# Altium PCB project.PcbDoc
Units mm, origin at the board's own origin, x right, y up, seen from the top; angles counter-clockwise.
Board outline 72.52 x 86.49 mm, 2 copper layers (Top Layer, Bottom Layer); 18 components, 19 nets, 77 pads, 0 vias.
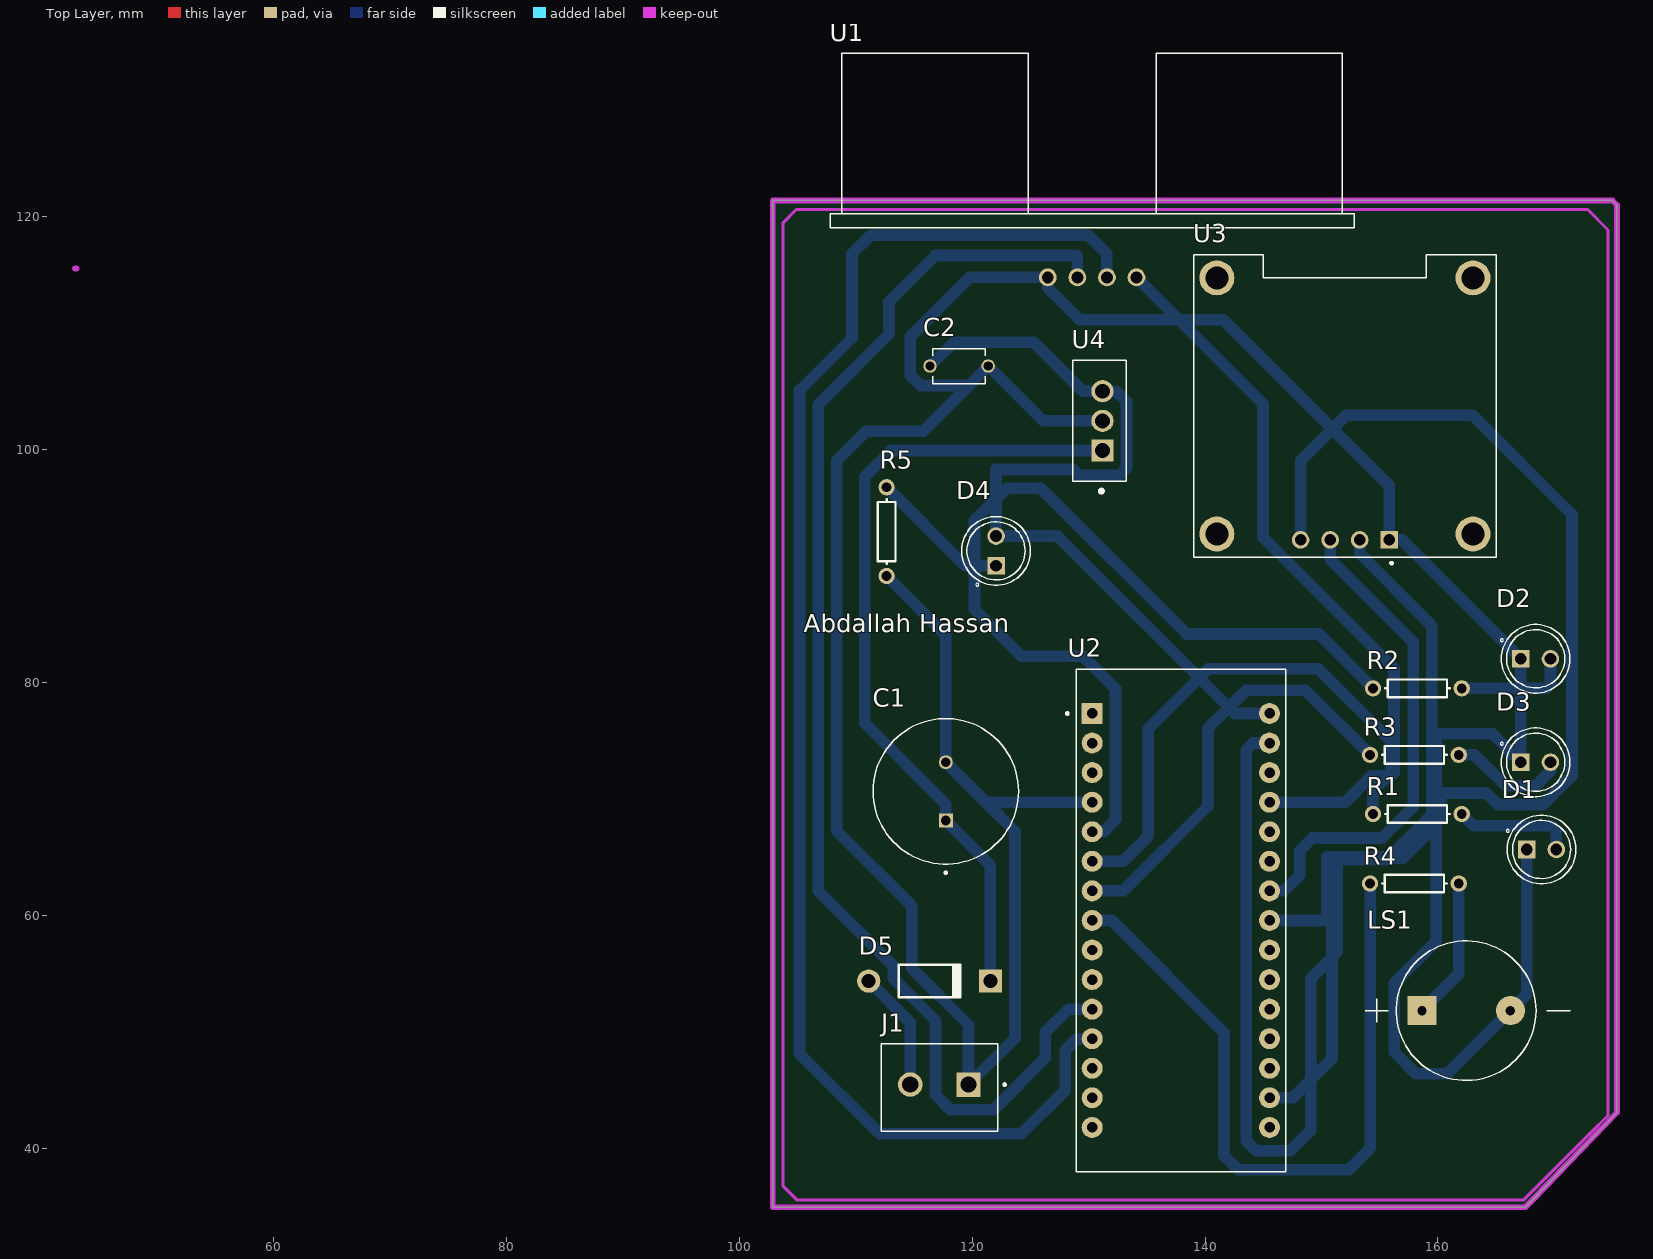
[diagram p0: Top Layer view]
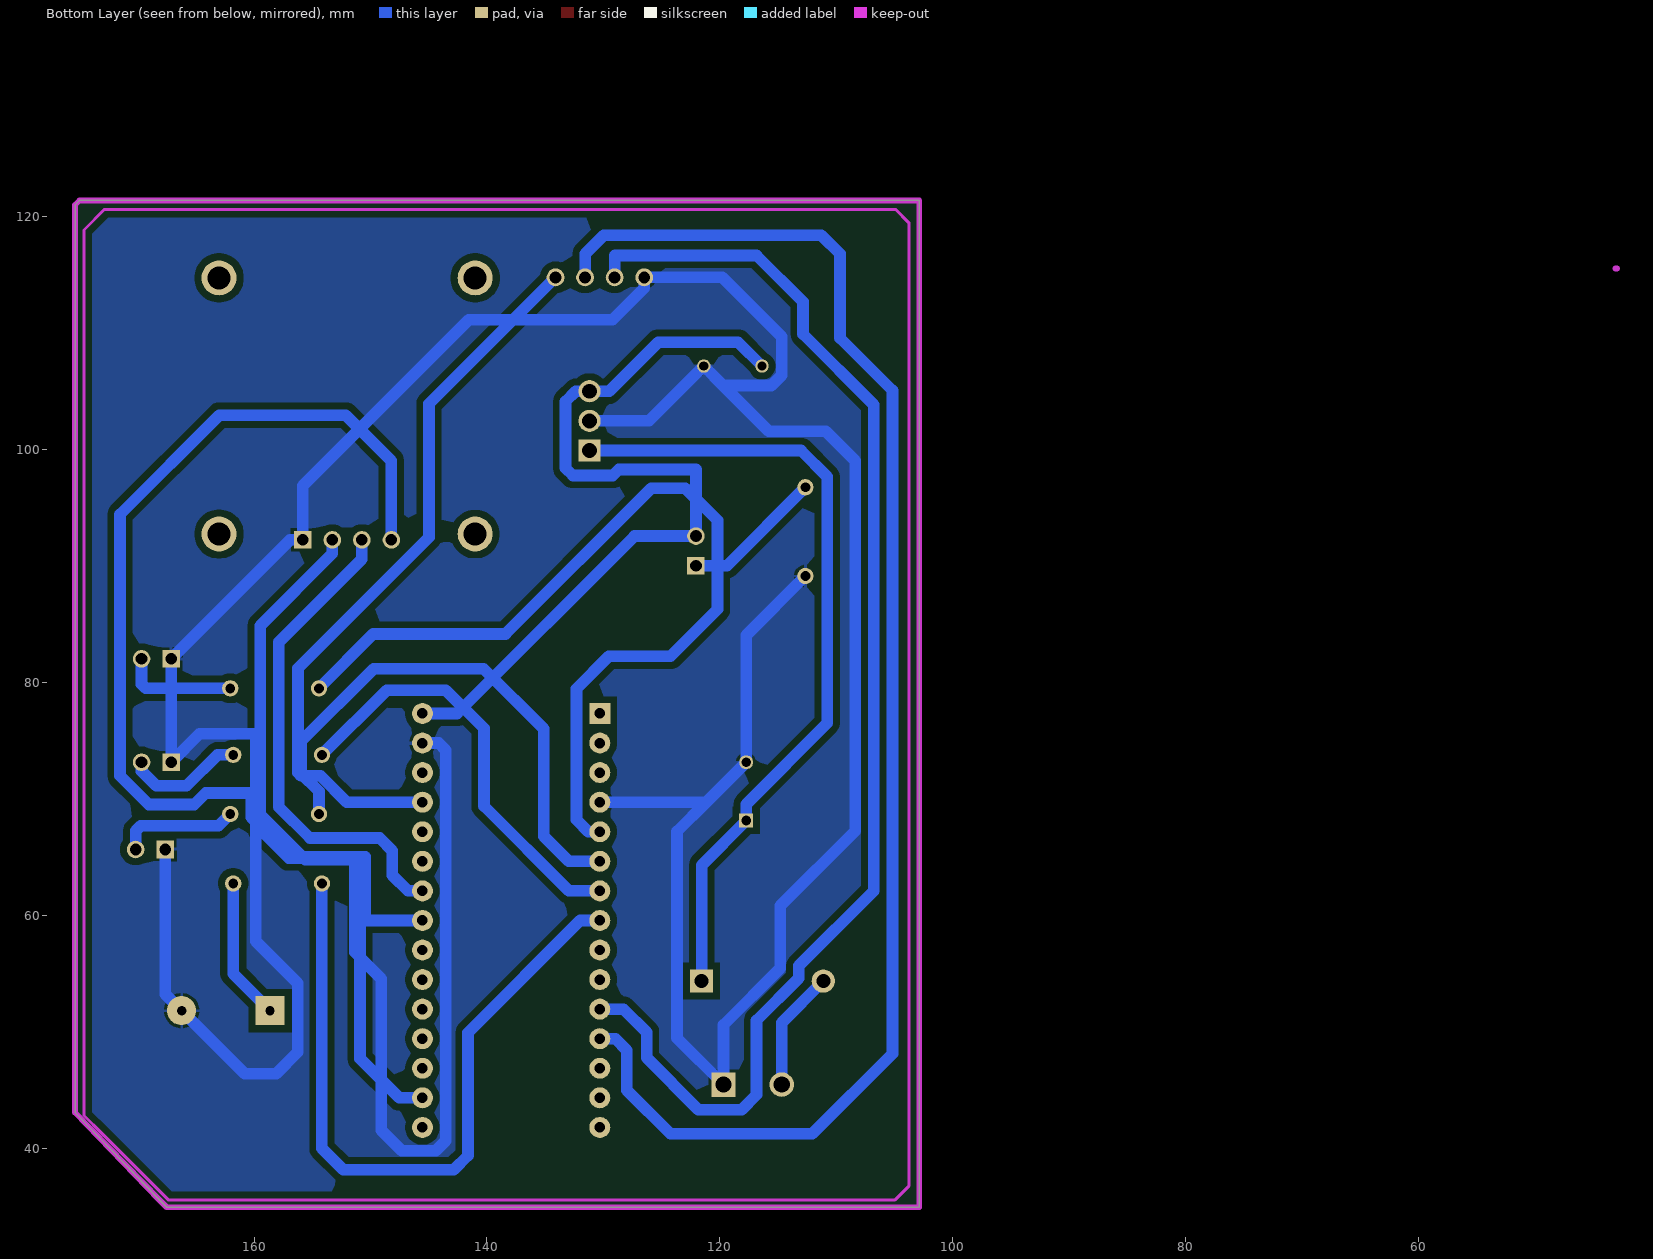
[diagram p1: Bottom Layer view, seen from below]
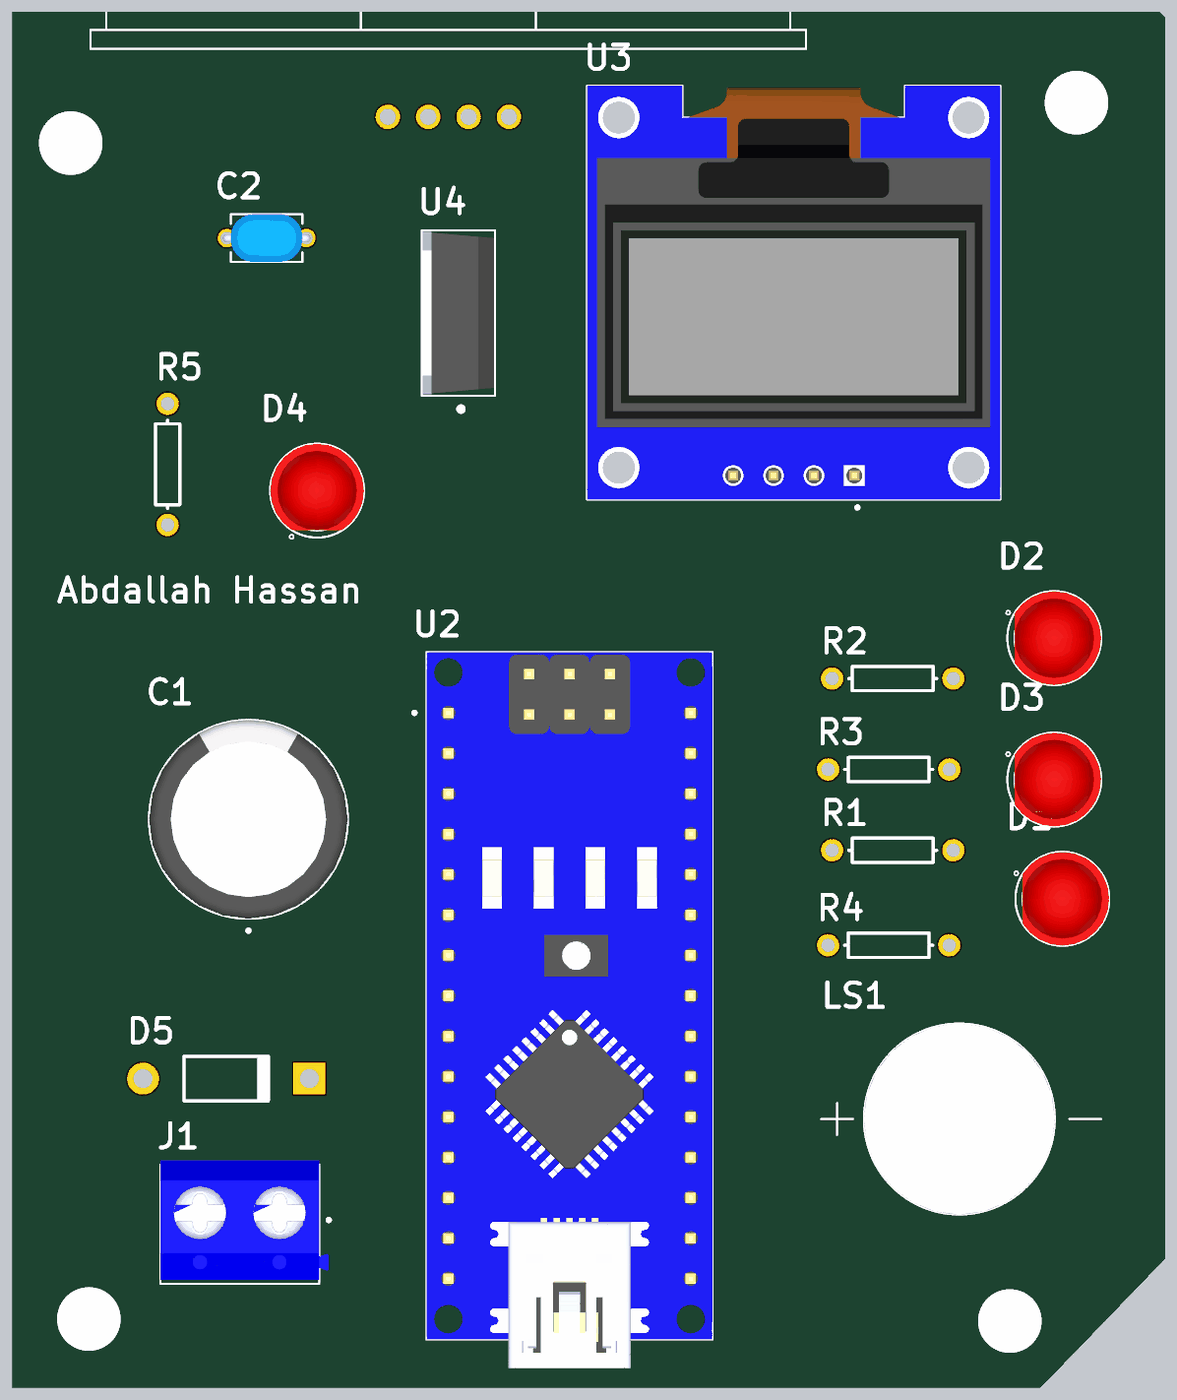
[diagram p2: 3D render of the assembled board from above, using the file's embedded part models]

## Layer stack, top to bottom
Top Solder: solder mask 0.0102, Solder Resist, Dk 3.5
Top Layer: signal copper 0.0356
Dielectric 1: dielectric 0.32, FR-4, Dk 4.8
Bottom Layer: signal copper 0.0356
Bottom Solder: solder mask 0.0102, Solder Resist, Dk 3.5

## Board outline
168.148,35.56 167.513,34.925 102.87,34.925 102.87,121.412 175.006,121.412 175.387,121.031 175.387,43.053

## Design rules (kind name [scope] priority, off if disabled: settings)
Clearance [All] p1: gap=0.6 ignorepadtopadclearanceinfootprint=FALSE
PolygonConnect [All] p1: connectstyle=Relief reliefconductorwidth=0.254 reliefentries=4 polygonreliefangle="90 Angle" airgapwidth=0.254
RoutingVias [All] p1: holewidth=0.711 width=1.27 viastyle="Through Hole" minholewidth=0.711 minwidth=1.27 maxholewidth=0.711 maxwidth=1.27
SolderMaskExpansion [All] p1: expansion=0.102 istentingtop=FALSE
SupplyNets "Schematic Supply Nets_11" [InNet('GND')] p1: voltage=0.000
SupplyNets "Schematic Supply Nets_10" [InNet('VIN')] p2: voltage=0.000
SupplyNets "Schematic Supply Nets_9" [InNet('SDA')] p3: voltage=0.000
SupplyNets "Schematic Supply Nets_8" [InNet('ECHO')] p4: voltage=0.000
SupplyNets "Schematic Supply Nets_7" [InNet('TRIG')] p5: voltage=0.000
SupplyNets "Schematic Supply Nets_6" [InNet('VCC')] p6: voltage=0.000
SupplyNets "Schematic Supply Nets_5" [InNet('LED_Y')] p7: voltage=0.000
SupplyNets "Schematic Supply Nets_4" [InNet('B')] p8: voltage=0.000
SupplyNets "Schematic Supply Nets_3" [InNet('LED_R')] p9: voltage=0.000
SupplyNets "Schematic Supply Nets_2" [InNet('LED_G')] p10: voltage=0.000
SupplyNets "Schematic Supply Nets_1" [InNet('VCC_IN')] p11: voltage=0.000
SupplyNets "Schematic Supply Nets" [InNet('SCL')] p12: voltage=0.000
Width [All] p1: maxlimit=1 minlimit=1 preferedwidth=1 minimp=50.000000 maximp=50.000000 favimp=50.000000
30 further rules are at their usual default settings.

## Components (designator, comment, footprint, x,y, rotation, side; value= is the part's Value field where it differs from the comment)
C1 "ECA2AHG221B" CAPPRD500W60D1250H2500 117.729,70.652 r90 top
C2 "FA24NP02E103JNU06" CAPRB500W50L450T300H550 118.872,107.188 r180 top
D1 "WP7113ID" LED_WP7113ID 168.91,65.659 r0 top
D2 "WP7113ID" LED_WP7113ID 168.402,82.042 r0 top
D3 "WP7113ID" LED_WP7113ID 168.402,73.152 r0 top
D4 "WP7113ID" LED_WP7113ID 122.047,91.313 r90 top
D5 "Diode 1N4001" DO-41 116.332,54.356 r0 top
J1 "KF301-2P" HANDSON_KF301-2P 117.181,45.466 r180 top
LS1 "CMI-1210-5-95T" XDCR_CMI-1210-5-95T 162.433,51.816 r0 top
R1 "Res1" AXIAL-0.3 158.242,68.707 r0 top value=220
R2 "Res1" AXIAL-0.3 158.242,79.502 r0 top value=220
R3 "Res1" AXIAL-0.3 157.988,73.787 r0 top value=220
R4 "Res1" AXIAL-0.3 157.988,62.738 r0 top value=220
R5 "Res1" AXIAL-0.3 112.649,92.964 r90 top value=220
U1 "HC-SR04" XCVR_HC-SR04 130.302,114.808 r180 top
U2 "ARDUINO_NANO" MODULE_ARDUINO_NANO 137.922,59.563 r0 top
U3 "DM-OLED096-636" MODULE_DM-OLED096-636 152.019,103.759 r180 top
U4 "L7812CV" TO-220-3 130.931,102.479 r90 top

## Footprints (in the part's own frame and the unit in brackets; to place one, negate y for a bottom-side part, rotate by r counter-clockwise, add the part's x,y. Pads: shape width x height; smd on the part's side, far side on the other; paste and mask are expansions set on the pad)
AXIAL-0.3 [mm] "Axial Device, Thru-Hole; 2 Leads; 0.3 in Pin Spacing"
  round 1.4 hole 0.85: 1(-3.81,0) 2(3.81,0)
  silkscreen extent -2.77,-0.76 2.77,0.76
CAPPRD500W60D1250H2500 [mm]
  round 1.2 hole 0.85: N(2.5,0)
  rect 1.2x1.2 hole 0.85: P(-2.5,0)
  silkscreen extent -7.1,-6.25 6.25,6.25, body extent -6.25,-6.25 6.25,6.25, height 25
CAPRB500W50L450T300H550 [mm]
  round 1.15 hole 0.8: 1(-2.5,0) 2(2.5,0)
  silkscreen extent -2.25,-1.5 2.25,1.5, body extent -2.75,-1.5 2.75,1.5, height 5.5
DO-41 [mm] "Diode, Axial; Body 5.2 x 2.7 mm (LxDia. max), Lead Dia. 0.86 mm (max)"
  round 2 hole 1.2: 1(-5.23,0)
  rect 2x2 hole 1.2: 2(5.23,0)
  silkscreen extent -2.65,-1.4 2.75,1.4
HANDSON_KF301-2P [mm]
  rect 2.1x2.1 / inner round 2.1 / far side rect 2.1x2.1 hole 1.4: 1(-2.5,0)
  round 2.1 hole 1.4: 2(2.5,0)
  silkscreen extent -5.7,-3.5 5,4, body extent -5.6,-3.75 5,3.75, height 10
LED_WP7113ID [mm]
  round 1.508 hole 1: A(1.27,0)
  rect 1.508x1.508 / inner round 1.508 / far side rect 1.508x1.508 hole 1: C(-1.27,0)
  silkscreen extent -3.03,-2.95 2.95,2.95, body extent -2.5,-2.95 2.95,2.95, height 9.6
MODULE_ARDUINO_NANO [mm]
  rect 1.8x1.8 / inner round 1.8 / far side rect 1.8x1.8 hole 0.9: 1(-7.62,17.78)
  round 1.8 hole 0.9: 2(-7.62,15.24) 3(-7.62,12.7) 4(-7.62,10.16) 5(-7.62,7.62) 6(-7.62,5.08) 7(-7.62,2.54) 8(-7.62,0) 9(-7.62,-2.54) 10(-7.62,-5.08) 11(-7.62,-7.62) 12(-7.62,-10.16) 13(-7.62,-12.7) 14(-7.62,-15.24) 15(-7.62,-17.78) 16(7.62,-17.78) 17(7.62,-15.24) 18(7.62,-12.7) 19(7.62,-10.16) 20(7.62,-7.62) 21(7.62,-5.08) 22(7.62,-2.54) 23(7.62,0) 24(7.62,2.54) 25(7.62,5.08) 26(7.62,7.62) 27(7.62,10.16) 28(7.62,12.7) 29(7.62,15.24) 30(7.62,17.78)
  silkscreen extent -9.85,-21.6 9,21.6, body extent -9,-23.4 9,21.6, height 12.6
MODULE_DM-OLED096-636 [mm]
  rect 1.508x1.508 hole 1: 1(-3.81,11.5)
  round 1.508 hole 1: 2(-1.27,11.5) 3(1.27,11.5) 4(3.81,11.5)
  round 3 hole 2: S1(-11,11) S2(11,11) S3(11,-11) S4(-11,-11)
  silkscreen extent -13,-13 13,13.6, body extent -13,-13 13,13, height 5.66
TO-220-3 [mm]
  rect 1.91x1.91 / inner round 1.91 / far side rect 1.91x1.91 hole 1.27: 1(-2.55,-0.26)
  round 1.91 hole 1.27: 2(0,-0.26) 3(2.55,-0.26)
  silkscreen extent -6.19,-2.3 5.2,2.3, body extent -5.1,-2.25 5.1,2.25, height 19.68
XCVR_HC-SR04 [mm]
  round 1.53 hole 1.02: 1(-3.81,0) 2(-1.27,0) 3(1.27,0) 4(3.81,0)
  silkscreen extent -22.5,-19.27 22.5,-4.27
XDCR_CMI-1210-5-95T [mm]
  round 2.5 hole 0.8: N(3.8,0)
  rect 2.5x2.5 / inner round 2.5 / far side rect 2.5x2.5 hole 0.8: P(-3.8,0)
  silkscreen extent -8.69,-6 8.92,6, body extent -6,-6 6,6, height 7

## Part data
C1: "CAP ALUM 220UF 20% 100V RADIAL", Package="RADIAL-2 Panasonic", Availability="In Stock", Check_prices=https://www.snapeda.com/parts/ECA2AHG221B/Panasonic/view-part/?ref=eda, MF=Panasonic, MP=ECA2AHG221B, Price=None, Purchase-URL=https://pricing.snapeda.com/search/part/ECA2AHG221B/?ref=eda, SnapEDA_Link=https://www.snapeda.com/parts/ECA2AHG221B/Panasonic/view-part/?ref=snap
C2: "Cap Ceramic 0.01uF 250V C0G 5% Radial 5mm 150C Automotive Ammo", Package="Radial TDK", Check_prices=https://www.snapeda.com/parts/FA24NP02E103JNU06/TDK/view-part/?ref=eda, MF=TDK, MP=FA24NP02E103JNU06, SnapEDA_Link=https://www.snapeda.com/parts/FA24NP02E103JNU06/TDK/view-part/?ref=snap
D1 D2 D3 D4: "Red 617nm LED Indication - Discrete 2V Radial", Package="Radial Kingbright", Availability="In Stock", Check_prices=https://www.snapeda.com/parts/WP7113ID/Kingbright/view-part/?ref=eda, MF=Kingbright, MP=WP7113ID, Price=None, Purchase-URL=https://pricing.snapeda.com/search/part/WP7113ID/?ref=eda, SnapEDA_Link=https://www.snapeda.com/parts/WP7113ID/Kingbright/view-part/?ref=snap
D5: "1 Amp General Purpose Rectifier", Code_JEDEC=DO-204-AL, ComponentLink1Description="Manufacturer Link", ComponentLink1URL=http://www.fairchildsemi.com/, ComponentLink2Description=Datasheet, ComponentLink2URL=http://www.fairchildsemi.com/ds/1N%2F1N4001.pdf, DatasheetVersion=1998, LatestRevisionDate=17-Jul-2002, LatestRevisionNote="Re-released for DXP Platform.", PackageDescription="Diode, Axial; Body 5.2 x 2.7 mm (LxDia. max), Lead Dia. 0.86 mm (max)", PackageReference=DO-41, PackageVersion=Aug-1999, Published=8-Jun-2000, Publisher="Altium Limited"
J1: "2 Pin Terminal Block 5mm Pitch", Package=None, Check_prices=https://www.snapeda.com/parts/KF301-2P/Handson+Technology/view-part/?ref=eda, MF="Handson Technology", MP=KF301-2P, SnapEDA_Link=https://www.snapeda.com/parts/KF301-2P/Handson+Technology/view-part/?ref=snap
LS1: "12 mm, 5 Vdc, 98 dB, Through Hole, Magnetic Audio Indicator Buzzer", Package=None, Check_prices=https://www.snapeda.com/parts/CMI-1210-5-95T/Same+Sky/view-part/?ref=eda, MF="Same Sky", MP=CMI-1210-5-95T, SnapEDA_Link=https://www.snapeda.com/parts/CMI-1210-5-95T/Same+Sky/view-part/?ref=snap
R1 R2 R3 R4 R5: "Resistor", LatestRevisionDate=17-Jul-2002, LatestRevisionNote="Re-released for DXP Platform.", PackageDescription="Axial Device, Thru-Hole; 2 Leads; 0.3 in Pin Spacing", PackageReference=AXIAL-0.3, Published=8-Jun-2000, Publisher="Altium Limited"
U1: "Ultrasonic Sensor Module", Package=None, Availability=Unavailable, MP=HC-SR04, Price=None
U2: "Small, complete, and breadboard-friendly board based on the ATmega328 (Arduino Nano 3.x)", Package="Non-Standard Arduino", Check_prices=https://www.snapeda.com/parts/Arduino%20Nano/Arduino/view-part/?ref=eda, MF=Arduino, MP="Arduino Nano", SnapEDA_Link=https://www.snapeda.com/parts/Arduino%20Nano/Arduino/view-part/?ref=snap
U3: "0.96â€ 128 X 64 MONOCHROME GRAPHIC OLED DISPLAY MODULE - I2C", Package=Package, Check_prices=https://www.snapeda.com/parts/DM-OLED096-636/Display+Module/view-part/?ref=eda, MF="Display Module", MP=DM-OLED096-636, SnapEDA_Link=https://www.snapeda.com/parts/DM-OLED096-636/Display+Module/view-part/?ref=snap
U4: "Linear Voltage Regulator IC Positive Fixed 1 Output 1.5A TO-220", Package="TO-220-3 STMicroelectronics", Check_prices=https://www.snapeda.com/parts/L7812CV/STMicroelectronics/view-part/?ref=eda, MF=STMicroelectronics, MP=L7812CV, SnapEDA_Link=https://www.snapeda.com/parts/L7812CV/STMicroelectronics/view-part/?ref=snap

## Free pads (board coordinates)
  round 4 on Top Overlay: 20(165.608,39.116) 21(107.696,39.243) 22(106.553,113.157) 23(169.799,115.697)

## Nets (pads, with @x,y where several pads share a name; then routed paths per layer and width w, separated by ;. In a path a pad name is that pad's centre, name@x,y a point inside that pad or via, vN(x,y) a via of type N, cw(c..) or ccw(c..) an arc to the next point about the centre after c; other vN are vias at no path point)
B: R4.1 U2.8 | length 62.4
  Bottom Layer w1: U2.8 131.978,59.563 141.626,49.916 141.626,39.37 142.845,38.151 152.349,38.151 154.178,39.98 R4.1
ECHO: U1.3 U2.11 | length 113.4
  Bottom Layer w1: U1.3 129.032,116.662 129.007,116.688 116.84,116.688 112.852,112.7 112.852,109.946 106.767,103.861 106.767,62.093 113.202,55.657 113.202,54.61 116.84,50.972 116.84,44.577 118.11,43.307 121.844,43.307 126.289,47.752 126.289,49.962 128.27,51.943 U2.11
GND: C1.N C2.1 D1.C D2.C D3.C J1.1 LS1.N R5.1 U1.4 U2.4 U2.29 U3.1 U4.2 | length 375.9
  Bottom Layer w1: R5.1 117.729,84.074 C1.N 121.158,69.723 ; U2.4 121.158,69.723 ; U4.2 126.081,102.479 C2.1 119.696,105.512 ; U2.29 144.145,74.803 143.535,74.193 143.535,40.64 144.399,39.776 147.32,39.776 149.073,41.529 149.073,54.559 151.333,56.82 151.333,64.795 155.62,64.795 159.868,69.043 ; D1.C 167.64,53.223 LS1.N 160.823,46.406 158.115,46.406 156.261,48.26 156.261,54.178 159.868,57.785 159.868,69.043 ; 119.696,105.512 115.784,101.6 110.907,101.6 108.367,99.06 108.367,67.25 114.802,60.815 114.802,55.454 119.681,50.575 J1.1 123.673,49.458 123.673,67.208 121.158,69.723 ; 119.696,105.512 115.57,105.512 114.681,106.401 114.681,109.703 119.786,114.808 U1.4 126.492,113.894 129.212,111.174 141.556,111.174 155.829,96.901 U3.1 156.915,92.259 D2.C D3.C 164.694,75.59 159.868,75.59 159.868,69.043
LED_G: R2.1 U2.5 | length 78.8
  Bottom Layer w1: U2.5 131.293,67.183 132.309,68.199 132.309,79.477 129.54,82.245 124.231,82.245 120.193,86.284 120.193,93.929 122.961,96.698 125.882,96.698 138.405,84.176 149.758,84.176 R2.1
LED_R: R3.1 U2.7 | length 37.2
  Bottom Layer w1: U2.7 132.969,62.103 140.259,69.393 140.259,76.073 143.535,79.35 148.615,79.35 R3.1
LED_Y: R1.1 U2.6 | length 47.4
  Bottom Layer w1: U2.6 132.969,64.643 135.128,66.802 135.128,76.022 140.297,81.191 149.72,81.191 155.981,74.93 155.981,72.219 154.432,70.67 R1.1
NetC1_P: C1.P D5.2 U4.1 | length 69.1
  Bottom Layer w1: D5.2 121.562,64.319 C1.P 117.729,69.558 110.767,76.521 110.767,97.669 113.027,99.929 U4.1
NetD1_A: D1.A R1.2 | length 10.3
  Bottom Layer w1: R1.2 163.068,67.691 169.748,67.691 170.18,67.259 D1.A
NetD2_A: D2.A R2.2 | length 10
  Bottom Layer w1: R2.2 169.316,79.502 169.672,79.858 D2.A
NetD3_A: D3.A R3.2 | length 10.3
  Bottom Layer w1: R3.2 163.143,73.787 165.81,71.12 168.402,71.12 169.672,72.39 D3.A
NetD4_C: D4.C R5.2 | length 12.2
  Bottom Layer w1: R5.2 119.38,90.043 D4.C
NetD5_1: D5.1 J1.2 | length 10.4
  Bottom Layer w1: D5.1 114.681,50.777 J1.2
NetLS1_P: LS1.P R4.2 | length 12.2
  Bottom Layer w1: LS1.P 161.798,54.981 R4.2
SCL: U2.24 U3.3 | length 42.4
  Bottom Layer w1: U2.24 146.787,62.103 148.128,63.445 148.128,65.548 149.225,66.645 155.207,66.645 157.872,69.31 157.872,83.477 150.749,90.601 U3.3
SDA: U2.23 U3.4 | length 94.1
  Bottom Layer w1: U2.23 150.444,59.563 150.444,65.024 156.846,65.024 160.249,68.426 160.249,70.51 164.157,70.51 165.147,69.52 169.065,69.52 171.526,71.981 171.526,94.437 162.992,102.972 152.121,102.972 148.209,99.06 U3.4
TRIG: U1.2 U2.12 | length 129.2
  Bottom Layer w1: U2.12 128.956,49.403 127.978,48.426 127.978,44.976 124.231,41.229 112.044,41.229 105.167,48.106 105.167,105.087 109.677,109.597 109.677,116.84 111.277,118.44 129.972,118.44 131.572,116.84 U1.2
VCC: U1.1 U2.27 | length 63.5
  Bottom Layer w1: U1.1 144.983,103.937 144.983,92.481 156.235,81.229 156.235,72.238 155.981,71.984 154.305,71.984 152.044,69.723 U2.27
VCC_IN: U2.17 U3.2 | length 61
  Bottom Layer w1: U2.17 147.542,44.323 150.901,47.682 150.901,64.922 157.023,64.922 159.487,67.386 159.487,84.887 153.289,91.084 U3.2
VIN: C2.2 D4.A U2.30 U4.3 | length 72.8
  Bottom Layer w1: C2.2 118.429,109.245 125.273,109.245 129.489,105.029 U4.3 132.359,105.029 133.248,104.14 133.248,98.425 132.613,97.79 129.184,97.79 128.676,98.298 122.047,98.298 D4.A 127.33,92.583 142.57,77.343 U2.30
pads on no net: U2.1 U2.2 U2.3 U2.9 U2.10 U2.13 U2.14 U2.15 U2.16 U2.18 U2.19 U2.20 U2.21 U2.22 U2.25 U2.26 U2.28 U3.S1 U3.S2 U3.S3 U3.S4

## Polygon pours and split planes (outlines as drawn)
GND on Bottom Layer "GND_L02_P000" (solid, remove dead copper, pour order 0): 168.148,35.56 167.513,34.925 102.87,34.925 102.87,121.412 175.006,121.412 175.387,121.031 175.387,43.053

## Keep-outs
Keep-Out Layer:
  lines w0.254: 172.847,120.636 172.847,120.623 172.847,120.65 ; 172.847,120.65 174.625,118.872 174.625,45.466 174.625,42.799 173.101,41.275 167.386,35.56 104.929,35.56 103.759,36.73 103.759,71.628 103.759,119.507 104.902,120.65 172.847,120.65
  lines w0.5: 42.926,115.57 43.053,115.57 ; 102.87,34.925 102.87,121.412 175.006,121.412 175.387,121.031 175.387,43.053 168.148,35.56 167.513,34.925 102.87,34.925

## Silkscreen, mask and mechanical layers (free items; w line width, h text height)
Top Overlay:
  text "Abdallah Hassan" at 105.537,84.328 h1.52